# EAGLE board NeoJointV2A-075ear (EAGLE 6.6.0)
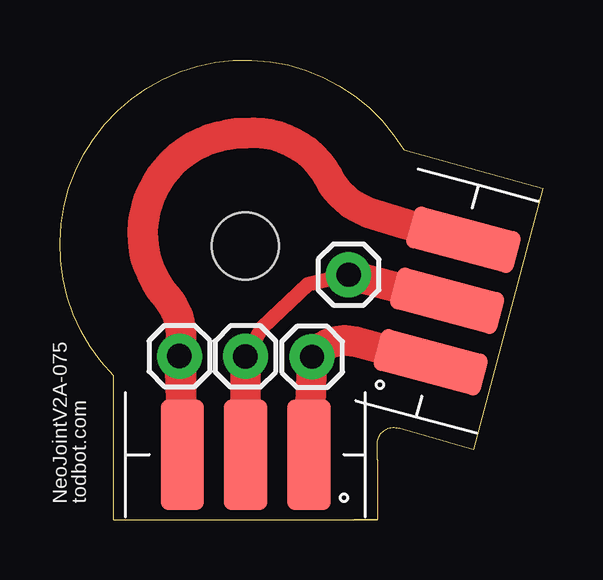
[diagram p0: board, top side]

Size 20.14 x 19.15 mm. Coordinates in mm from the lower left corner, seen from the top.
Outline: 12.27,0 2.24,0 2.24,6 arc-194 14.34,15.4 20.14,13.8 17.24,2.9 14.14,3.8 arc105 13.24,3.2 13.24,2.5 13.24,0
Outline: 12.27,0 13.24,0
Outline: 13.24,0 12.27,0
Copper layers (1*16): Top 0.0356mm / dielectric 1.5011mm / Bottom 0.0356mm
Design rules "LaenPCBOrder-tod": minimum track width 10mil, minimum drill 13mil, track to track 6mil, track to pad 8mil, pad to pad 8mil, via to via 8mil, smd to smd 6mil, copper to edge 15mil, drill to drill 8mil, minimum pad ring 7mil, minimum via ring 7mil, stop-mask expansion 4mil, vias tented up to drill 25mil, thermal gap 10mil
Holes 2.8 mm at 7.74,11.4

## Footprints (pad centres in the part's own frame; a part is rotated, then mirrored left to right if it is on the bottom)
1X01 = drill 1.016 pad 1.88: 1 0,0
LEDSTRIP-3P = smd 4.6 x 1.8: A 0,-2.65; B 0,0; C 0,2.63

## Placement (x,y rotation side)
JP1  [1X01]  10.51,6.78 0 top
JP2  [1X01]  12.04,10.2 0 top
JP3  [1X01]  4.98,6.81 0 top
JP4  [1X01]  7.74,6.8 0 top
U$1  LED_STRIP_3P  [LEDSTRIP-3P]  7.74,2.7 90 top
U$2  LED_STRIP_3P  [LEDSTRIP-3P]  16.15,9.11 345 top

## Library data of the parts
JP1-JP4 = SparkFun-Connectors
U$1 U$2 = todstuff

## Nets
A: JP1.1 U$1.A U$2.A
B: JP2.1 JP4.1 U$1.B U$2.B
C: JP3.1 U$1.C U$2.C

## Tracks (layer width: path | path; a pad name or v marks a point on that pad's centre or on a via)
A
  Top 1.27: U$1.A JP1.1 arc-68 12.34,7.4 U$2.A
B
  Top 0.61: JP4.1 8.44,8 10.34,9.8 JP2.1
  Top 1.27: U$1.B JP4.1 | U$2.B JP2.1
C
  Top 1.27: U$1.C 5.05,5 | 5.05,5 5.04,7.4 arc47 4.44,9.3 arc-53 3.54,12.7 arc-39 4.94,15.1 arc-40 7.74,16.1 arc-71 11.34,14 arc41 13.14,12.7 arc2 U$2.C | JP3.1 5.05,5

## Text on the board
tPlace: NeoJointV2A-075 | todbot.com